# EAGLE board avoccado-nora2-test-jig-panel-100x100 (EAGLE 7.2.0), part 1 of 2
Avoccado-avr-yolandi Yolandi is the minified version of Avoccado-avr with less pins broken out and a footprint of less than one square inch for the PCB without peripherals.
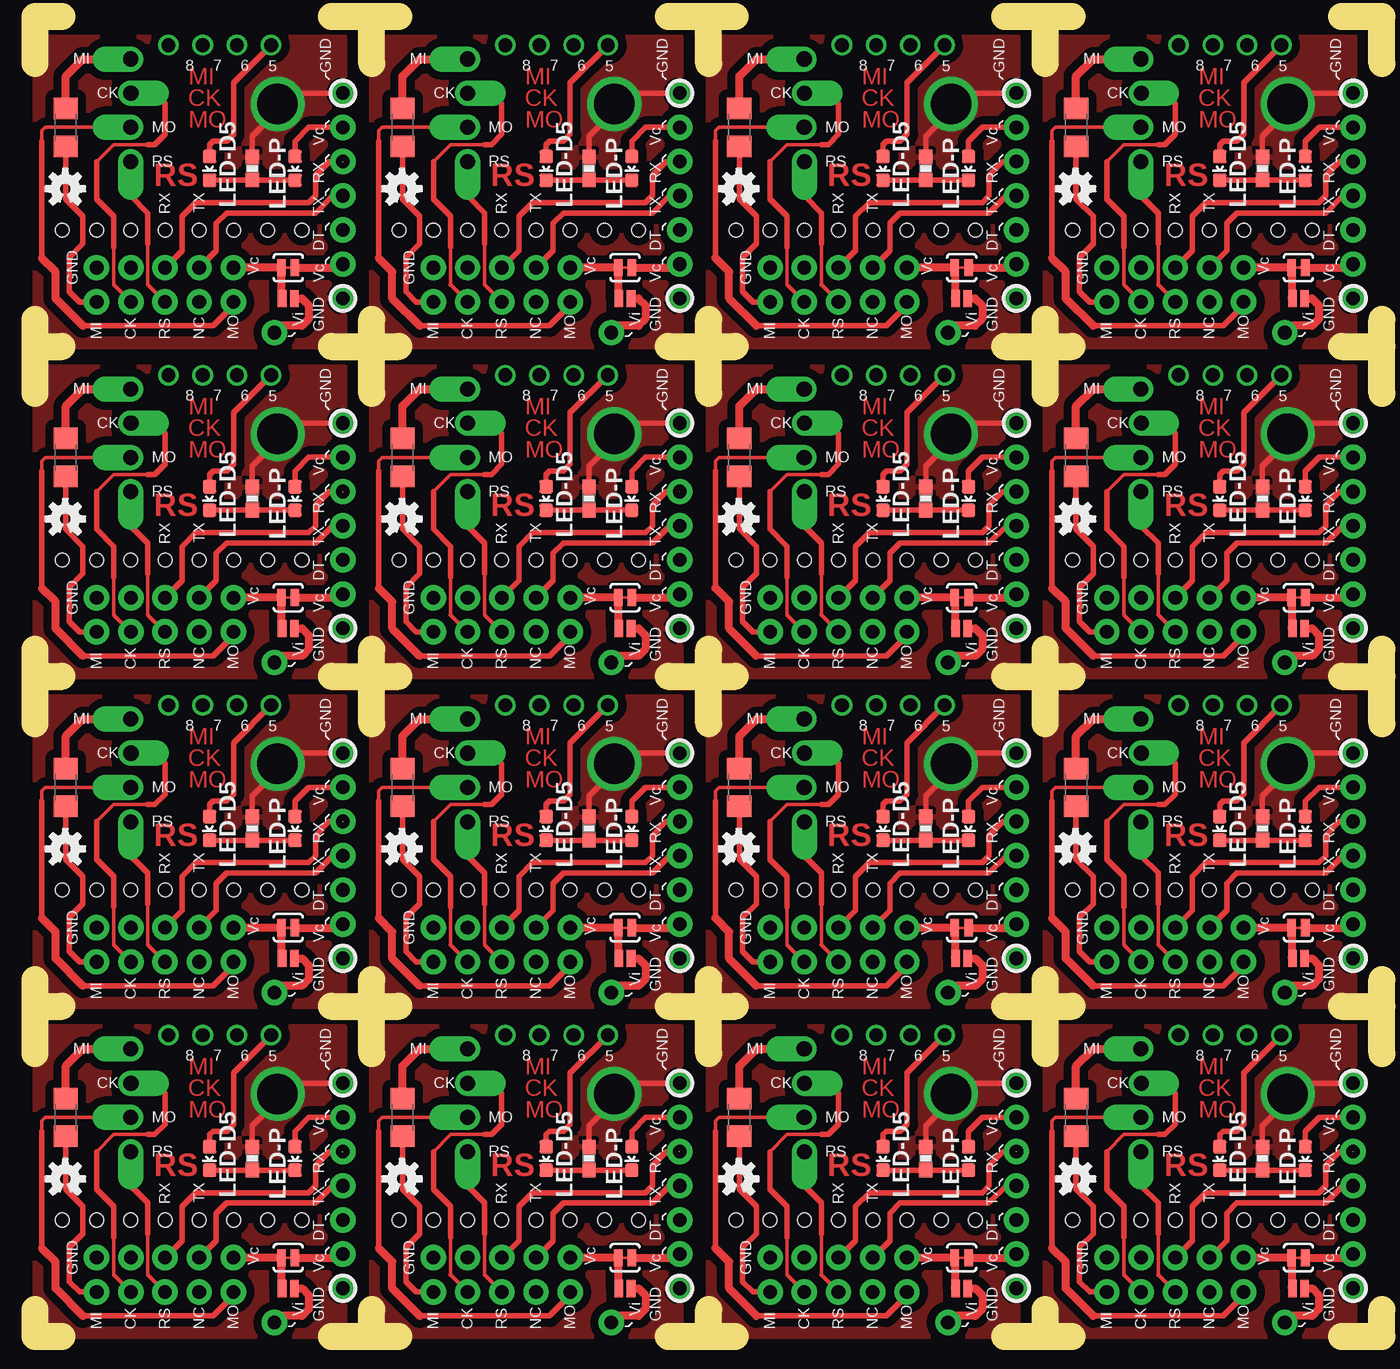
[diagram p0: board, top side]
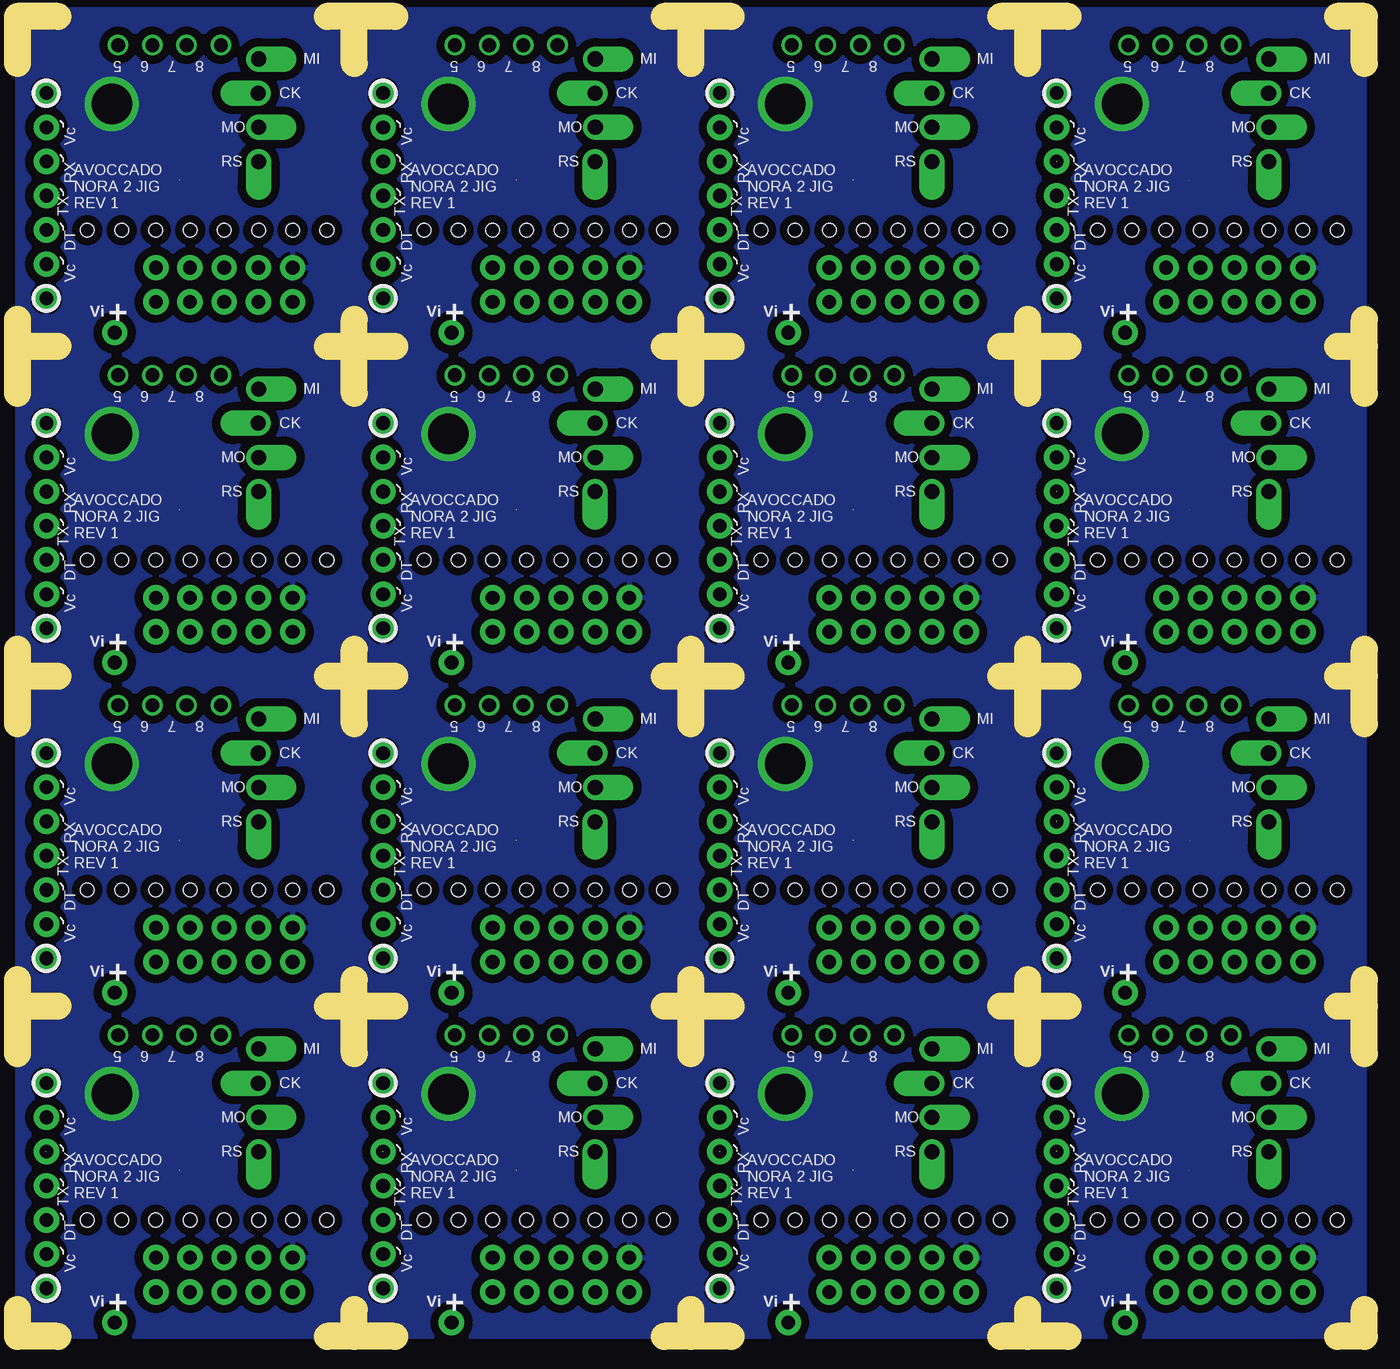
[diagram p1: board, bottom side, seen from below]

No outline drawn. Coordinates in mm, seen from the top.
Copper layers (1*16): Top 0.035mm / dielectric 1.5mm / Bottom 0.035mm
Design rules "dirt_cheap_dirty_boards.v1 *": minimum track width 5mil, minimum drill 12mil, track to track 5mil, track to pad 5mil, pad to pad 5mil, via to via 5mil, smd to smd 0mil, copper to edge 10mil, drill to drill 10mil, minimum pad ring 10mil, minimum via ring 6mil, stop-mask expansion 0mil, vias tented up to drill 25mil, thermal gap 10mil
Net classes: 1 vcc: width 0.254 mm; 3 usbvcc: width 0.203 mm, drill 0.61 mm, clearance 0.152 mm
Holes 1.02 mm at 4.57,8.64 7.11,8.64 9.65,8.64 12.19,8.64 14.73,8.64 17.27,8.64 19.81,8.64 2.03,8.64 4.57,33.14 7.11,33.14 9.65,33.14 12.19,33.14 14.73,33.14 17.27,33.14 19.81,33.14 2.03,33.14 29.57,8.64 32.11,8.64 34.65,8.64 37.19,8.64 39.73,8.64 42.27,8.64 44.81,8.64 27.03,8.64 29.57,33.14 32.11,33.14 34.65,33.14 37.19,33.14 39.73,33.14 42.27,33.14 44.81,33.14 27.03,33.14 54.57,8.64 57.11,8.64 59.65,8.64 62.19,8.64 64.73,8.64 67.27,8.64 69.81,8.64 52.03,8.64 54.57,33.14 57.11,33.14 59.65,33.14 62.19,33.14 64.73,33.14 67.27,33.14 69.81,33.14 52.03,33.14 79.57,8.64 82.11,8.64 84.65,8.64 87.19,8.64 89.73,8.64 92.27,8.64 94.81,8.64 77.03,8.64 79.57,33.14 82.11,33.14 84.65,33.14 87.19,33.14 89.73,33.14 92.27,33.14 94.81,33.14 77.03,33.14 4.57,57.64 7.11,57.64 9.65,57.64 12.19,57.64 14.73,57.64 17.27,57.64 19.81,57.64 2.03,57.64 4.57,82.14 7.11,82.14 9.65,82.14 12.19,82.14 14.73,82.14 17.27,82.14 19.81,82.14 2.03,82.14 29.57,57.64 32.11,57.64 34.65,57.64 37.19,57.64 39.73,57.64 42.27,57.64 44.81,57.64 27.03,57.64 29.57,82.14 32.11,82.14 34.65,82.14 37.19,82.14 39.73,82.14 42.27,82.14 44.81,82.14 27.03,82.14 54.57,57.64 57.11,57.64 59.65,57.64 62.19,57.64 64.73,57.64 67.27,57.64 69.81,57.64 52.03,57.64 54.57,82.14 57.11,82.14 59.65,82.14 62.19,82.14 64.73,82.14 67.27,82.14 69.81,82.14 52.03,82.14 79.57,57.64 82.11,57.64 84.65,57.64 87.19,57.64 89.73,57.64 92.27,57.64 94.81,57.64 77.03,57.64 79.57,82.14 82.11,82.14 84.65,82.14 87.19,82.14 89.73,82.14 92.27,82.14 94.81,82.14 77.03,82.14
tRestrict: area 3,3 to 14.7,7.1; area 7.1,9.1 to 12.7,21.3; area 12.7,19.8 to 14.7,21.3; area 1.5,3.6 to 5.1,15.7; area 3,27.5 to 14.7,31.6; area 7.1,33.6 to 12.7,45.8; area 12.7,44.3 to 14.7,45.8; area 1.5,28.1 to 5.1,40.2; area 28,3 to 39.7,7.1; area 32.1,9.1 to 37.7,21.3; area 37.7,19.8 to 39.7,21.3; area 26.5,3.6 to 30.1,15.7; 52 more areas
Milling: 128 lines

## Footprints (pad centres in the part's own frame; a part is rotated, then mirrored left to right if it is on the bottom)
LED-0603 = smd 1 x 1: A 0,-0.877; C 0,0.877
2X5_NOSILK = drill 1.016 pad 1.88: 1 -1.27,5.08; 2 1.27,5.08; 3 -1.27,2.54; 4 1.27,2.54; 5 -1.27,0; 6 1.27,0; 7 -1.27,-2.54; 8 1.27,-2.54; 9 -1.27,-5.08; 10 1.27,-5.08
1X01 = drill 1.016 pad 1.88: 1 0,0
1X01_OFFSET = drill 1.118 pad 1.88 offset: 1 0,0
1206 = smd 1.6 x 1.8: 1 -1.4,0; 2 1.4,0
0603-RES = smd 1.1 x 1: 1 -0.85,0; 2 0.85,0
PAD-JUMPER-2-NC_BY_TRACE_YES_SILK = smd 0.635 x 1.27: 1 -0.508,0; 2 0.508,0
PAD-JUMPER-2-NO_NO_SILK = smd 0.635 x 1.27: 1 -0.45,0; 2 0.45,0
1X01NS-KIT = drill 1.016 pad 1.524: 1 0,0

## Placement (x,y rotation side)
D5-LED  [LED-0603]  12.95,13.21 180 top
D5-LED1  [LED-0603]  12.95,37.71 180 top
D5-LED2  [LED-0603]  37.95,13.21 180 top
D5-LED3  [LED-0603]  37.95,37.71 180 top
D5-LED4  [LED-0603]  62.95,13.21 180 top
D5-LED5  [LED-0603]  62.95,37.71 180 top
D5-LED6  [LED-0603]  87.95,13.21 180 top
D5-LED7  [LED-0603]  87.95,37.71 180 top
D5-LED8  [LED-0603]  12.95,62.21 180 top
D5-LED9  [LED-0603]  12.95,86.71 180 top
D5-LED10  [LED-0603]  37.95,62.21 180 top
D5-LED11  [LED-0603]  37.95,86.71 180 top
D5-LED12  [LED-0603]  62.95,62.21 180 top
D5-LED13  [LED-0603]  62.95,86.71 180 top
D5-LED14  [LED-0603]  87.95,62.21 180 top
D5-LED15  [LED-0603]  87.95,86.71 180 top
ICSP  M05X2NO_SILK  [2X5_NOSILK]  9.65,4.57 90 bottom
ICSP1  M05X2NO_SILK  [2X5_NOSILK]  9.65,29.07 90 bottom
ICSP2  M05X2NO_SILK  [2X5_NOSILK]  34.65,4.57 90 bottom
ICSP3  M05X2NO_SILK  [2X5_NOSILK]  34.65,29.07 90 bottom
ICSP4  M05X2NO_SILK  [2X5_NOSILK]  59.65,4.57 90 bottom
ICSP5  M05X2NO_SILK  [2X5_NOSILK]  59.65,29.07 90 bottom
ICSP6  M05X2NO_SILK  [2X5_NOSILK]  84.65,4.57 90 bottom
ICSP7  M05X2NO_SILK  [2X5_NOSILK]  84.65,29.07 90 bottom
ICSP8  M05X2NO_SILK  [2X5_NOSILK]  9.65,53.57 90 bottom
ICSP9  M05X2NO_SILK  [2X5_NOSILK]  9.65,78.07 90 bottom
ICSP10  M05X2NO_SILK  [2X5_NOSILK]  34.65,53.57 90 bottom
ICSP11  M05X2NO_SILK  [2X5_NOSILK]  34.65,78.07 90 bottom
ICSP12  M05X2NO_SILK  [2X5_NOSILK]  59.65,53.57 90 bottom
ICSP13  M05X2NO_SILK  [2X5_NOSILK]  59.65,78.07 90 bottom
ICSP14  M05X2NO_SILK  [2X5_NOSILK]  84.65,53.57 90 bottom
ICSP15  M05X2NO_SILK  [2X5_NOSILK]  84.65,78.07 90 bottom
JP1  M01PTH  [1X01]  22.86,28.06 0 top
JP2  M01PTH  [1X01]  22.86,38.22 0 top
JP3  M01PTH  [1X01]  22.86,18.8 0 top
JP4  M01PTH  [1X01]  22.86,35.68 0 top
JP5  M01PTH  [1X01]  22.86,33.14 0 top
JP6  M01PTH  [1X01]  22.86,3.56 0 top
JP7  M01PTH  [1X01]  22.86,40.76 0 top
JP8  M01PTH  [1X01]  22.86,13.72 0 top
JP9  M01PTH  [1X01]  22.86,11.18 0 top
JP10  M01PTH  [1X01]  22.86,8.64 0 top
JP11  M01PTH  [1X01]  22.86,16.26 0 top
JP12  M01OFFSET  [1X01_OFFSET]  7.1,21.34 90 top
JP13  M01OFFSET  [1X01_OFFSET]  7.12,18.8 270 top
JP14  M01OFFSET  [1X01_OFFSET]  7.1,16.26 90 top
JP15  M01OFFSET  [1X01_OFFSET]  7.11,13.71 180 top
JP16  M01OFFSET  [1X01_OFFSET]  7.1,45.84 90 top
JP17  M01PTH  [1X01]  17.78,1.02 0 top
JP18  M01PTH  [1X01]  22.86,6.1 0 top
JP19  M01OFFSET  [1X01_OFFSET]  7.12,43.3 270 top
JP20  M01OFFSET  [1X01_OFFSET]  7.1,40.76 90 top
JP21  M01OFFSET  [1X01_OFFSET]  7.11,38.21 180 top
JP22  M01PTH  [1X01]  22.86,43.3 0 top
JP23  M01PTH  [1X01]  17.78,25.52 0 top
JP24  M01PTH  [1X01]  22.86,30.6 0 top
JP25  M01PTH  [1X01]  47.86,3.56 0 top
JP26  M01PTH  [1X01]  47.86,13.72 0 top
JP27  M01PTH  [1X01]  47.86,11.18 0 top
JP28  M01PTH  [1X01]  47.86,8.64 0 top
JP29  M01PTH  [1X01]  47.86,16.26 0 top
JP30  M01OFFSET  [1X01_OFFSET]  32.1,21.34 90 top
JP31  M01OFFSET  [1X01_OFFSET]  32.12,18.8 270 top
JP32  M01OFFSET  [1X01_OFFSET]  32.1,16.26 90 top
JP33  M01OFFSET  [1X01_OFFSET]  32.11,13.71 180 top
JP34  M01PTH  [1X01]  47.86,18.8 0 top
JP35  M01PTH  [1X01]  42.78,1.02 0 top
JP36  M01PTH  [1X01]  47.86,6.1 0 top
JP37  M01PTH  [1X01]  47.86,28.06 0 top
JP38  M01PTH  [1X01]  47.86,38.22 0 top
JP39  M01PTH  [1X01]  47.86,35.68 0 top
JP40  M01PTH  [1X01]  47.86,33.14 0 top
JP41  M01PTH  [1X01]  47.86,40.76 0 top
JP42  M01OFFSET  [1X01_OFFSET]  32.1,45.84 90 top
JP43  M01OFFSET  [1X01_OFFSET]  32.12,43.3 270 top
JP44  M01OFFSET  [1X01_OFFSET]  32.1,40.76 90 top
JP45  M01OFFSET  [1X01_OFFSET]  32.11,38.21 180 top
JP46  M01PTH  [1X01]  47.86,43.3 0 top
JP47  M01PTH  [1X01]  42.78,25.52 0 top
JP48  M01PTH  [1X01]  47.86,30.6 0 top
JP49  M01PTH  [1X01]  72.86,3.56 0 top
JP50  M01PTH  [1X01]  72.86,13.72 0 top
JP51  M01PTH  [1X01]  72.86,11.18 0 top
JP52  M01PTH  [1X01]  72.86,8.64 0 top
JP53  M01PTH  [1X01]  72.86,16.26 0 top
JP54  M01OFFSET  [1X01_OFFSET]  57.1,21.34 90 top
JP55  M01OFFSET  [1X01_OFFSET]  57.12,18.8 270 top
JP56  M01OFFSET  [1X01_OFFSET]  57.1,16.26 90 top
JP57  M01OFFSET  [1X01_OFFSET]  57.11,13.71 180 top
JP58  M01PTH  [1X01]  72.86,18.8 0 top
JP59  M01PTH  [1X01]  67.78,1.02 0 top
JP60  M01PTH  [1X01]  72.86,6.1 0 top
JP61  M01PTH  [1X01]  72.86,28.06 0 top
JP62  M01PTH  [1X01]  72.86,38.22 0 top
JP63  M01PTH  [1X01]  72.86,35.68 0 top
JP64  M01PTH  [1X01]  72.86,33.14 0 top
JP65  M01PTH  [1X01]  72.86,40.76 0 top
JP66  M01OFFSET  [1X01_OFFSET]  57.1,45.84 90 top
JP67  M01OFFSET  [1X01_OFFSET]  57.12,43.3 270 top
JP68  M01OFFSET  [1X01_OFFSET]  57.1,40.76 90 top
JP69  M01OFFSET  [1X01_OFFSET]  57.11,38.21 180 top
JP70  M01PTH  [1X01]  72.86,43.3 0 top
JP71  M01PTH  [1X01]  67.78,25.52 0 top
JP72  M01PTH  [1X01]  72.86,30.6 0 top
JP73  M01PTH  [1X01]  97.86,3.56 0 top
JP74  M01PTH  [1X01]  97.86,13.72 0 top
JP75  M01PTH  [1X01]  97.86,11.18 0 top
JP76  M01PTH  [1X01]  97.86,8.64 0 top
JP77  M01PTH  [1X01]  97.86,16.26 0 top
JP78  M01OFFSET  [1X01_OFFSET]  82.1,21.34 90 top
JP79  M01OFFSET  [1X01_OFFSET]  82.12,18.8 270 top
JP80  M01OFFSET  [1X01_OFFSET]  82.1,16.26 90 top
JP81  M01OFFSET  [1X01_OFFSET]  82.11,13.71 180 top
JP82  M01PTH  [1X01]  97.86,18.8 0 top
JP83  M01PTH  [1X01]  92.78,1.02 0 top
JP84  M01PTH  [1X01]  97.86,6.1 0 top
JP85  M01PTH  [1X01]  97.86,28.06 0 top
JP86  M01PTH  [1X01]  97.86,38.22 0 top
JP87  M01PTH  [1X01]  97.86,35.68 0 top
JP88  M01PTH  [1X01]  97.86,33.14 0 top
JP89  M01PTH  [1X01]  97.86,40.76 0 top
JP90  M01OFFSET  [1X01_OFFSET]  82.1,45.84 90 top
JP91  M01OFFSET  [1X01_OFFSET]  82.12,43.3 270 top
JP92  M01OFFSET  [1X01_OFFSET]  82.1,40.76 90 top
JP93  M01OFFSET  [1X01_OFFSET]  82.11,38.21 180 top
JP94  M01PTH  [1X01]  97.86,43.3 0 top
JP95  M01PTH  [1X01]  92.78,25.52 0 top
JP96  M01PTH  [1X01]  97.86,30.6 0 top
JP97  M01PTH  [1X01]  22.86,52.56 0 top
JP98  M01PTH  [1X01]  22.86,62.72 0 top
JP99  M01PTH  [1X01]  22.86,60.18 0 top
JP100  M01PTH  [1X01]  22.86,57.64 0 top
JP101  M01PTH  [1X01]  22.86,65.26 0 top
JP102  M01OFFSET  [1X01_OFFSET]  7.1,70.34 90 top
JP103  M01OFFSET  [1X01_OFFSET]  7.12,67.8 270 top
JP104  M01OFFSET  [1X01_OFFSET]  7.1,65.26 90 top
JP105  M01OFFSET  [1X01_OFFSET]  7.11,62.71 180 top
JP106  M01PTH  [1X01]  22.86,67.8 0 top
JP107  M01PTH  [1X01]  17.78,50.02 0 top
JP108  M01PTH  [1X01]  22.86,55.1 0 top
JP109  M01PTH  [1X01]  22.86,77.06 0 top
JP110  M01PTH  [1X01]  22.86,87.22 0 top
JP111  M01PTH  [1X01]  22.86,84.68 0 top
JP112  M01PTH  [1X01]  22.86,82.14 0 top
JP113  M01PTH  [1X01]  22.86,89.76 0 top
JP114  M01OFFSET  [1X01_OFFSET]  7.1,94.84 90 top
JP115  M01OFFSET  [1X01_OFFSET]  7.12,92.3 270 top
JP116  M01OFFSET  [1X01_OFFSET]  7.1,89.76 90 top
JP117  M01OFFSET  [1X01_OFFSET]  7.11,87.21 180 top
JP118  M01PTH  [1X01]  22.86,92.3 0 top
JP119  M01PTH  [1X01]  17.78,74.52 0 top
JP120  M01PTH  [1X01]  22.86,79.6 0 top
JP121  M01PTH  [1X01]  47.86,52.56 0 top
JP122  M01PTH  [1X01]  47.86,62.72 0 top
JP123  M01PTH  [1X01]  47.86,60.18 0 top
JP124  M01PTH  [1X01]  47.86,57.64 0 top
JP125  M01PTH  [1X01]  47.86,65.26 0 top
JP126  M01OFFSET  [1X01_OFFSET]  32.1,70.34 90 top
JP127  M01OFFSET  [1X01_OFFSET]  32.12,67.8 270 top
JP128  M01OFFSET  [1X01_OFFSET]  32.1,65.26 90 top
JP129  M01OFFSET  [1X01_OFFSET]  32.11,62.71 180 top
JP130  M01PTH  [1X01]  47.86,67.8 0 top
JP131  M01PTH  [1X01]  42.78,50.02 0 top
JP132  M01PTH  [1X01]  47.86,55.1 0 top
JP133  M01PTH  [1X01]  47.86,77.06 0 top
JP134  M01PTH  [1X01]  47.86,87.22 0 top
JP135  M01PTH  [1X01]  47.86,84.68 0 top
JP136  M01PTH  [1X01]  47.86,82.14 0 top
JP137  M01PTH  [1X01]  47.86,89.76 0 top
JP138  M01OFFSET  [1X01_OFFSET]  32.1,94.84 90 top
JP139  M01OFFSET  [1X01_OFFSET]  32.12,92.3 270 top
JP140  M01OFFSET  [1X01_OFFSET]  32.1,89.76 90 top
JP141  M01OFFSET  [1X01_OFFSET]  32.11,87.21 180 top
JP142  M01PTH  [1X01]  47.86,92.3 0 top
JP143  M01PTH  [1X01]  42.78,74.52 0 top
JP144  M01PTH  [1X01]  47.86,79.6 0 top
JP145  M01PTH  [1X01]  72.86,52.56 0 top
JP146  M01PTH  [1X01]  72.86,62.72 0 top
JP147  M01PTH  [1X01]  72.86,60.18 0 top
JP148  M01PTH  [1X01]  72.86,57.64 0 top
JP149  M01PTH  [1X01]  72.86,65.26 0 top
JP150  M01OFFSET  [1X01_OFFSET]  57.1,70.34 90 top
JP151  M01OFFSET  [1X01_OFFSET]  57.12,67.8 270 top
JP152  M01OFFSET  [1X01_OFFSET]  57.1,65.26 90 top
JP153  M01OFFSET  [1X01_OFFSET]  57.11,62.71 180 top
JP154  M01PTH  [1X01]  72.86,67.8 0 top
JP155  M01PTH  [1X01]  67.78,50.02 0 top
JP156  M01PTH  [1X01]  72.86,55.1 0 top
JP157  M01PTH  [1X01]  72.86,77.06 0 top
JP158  M01PTH  [1X01]  72.86,87.22 0 top
JP159  M01PTH  [1X01]  72.86,84.68 0 top
JP160  M01PTH  [1X01]  72.86,82.14 0 top
JP161  M01PTH  [1X01]  72.86,89.76 0 top
JP162  M01OFFSET  [1X01_OFFSET]  57.1,94.84 90 top
JP163  M01OFFSET  [1X01_OFFSET]  57.12,92.3 270 top
JP164  M01OFFSET  [1X01_OFFSET]  57.1,89.76 90 top
JP165  M01OFFSET  [1X01_OFFSET]  57.11,87.21 180 top
JP166  M01PTH  [1X01]  72.86,92.3 0 top
JP167  M01PTH  [1X01]  67.78,74.52 0 top
JP168  M01PTH  [1X01]  72.86,79.6 0 top
JP169  M01PTH  [1X01]  97.86,52.56 0 top
JP170  M01PTH  [1X01]  97.86,62.72 0 top
JP171  M01PTH  [1X01]  97.86,60.18 0 top
JP172  M01PTH  [1X01]  97.86,57.64 0 top
JP173  M01PTH  [1X01]  97.86,65.26 0 top
JP174  M01OFFSET  [1X01_OFFSET]  82.1,70.34 90 top
JP175  M01OFFSET  [1X01_OFFSET]  82.12,67.8 270 top
JP176  M01OFFSET  [1X01_OFFSET]  82.1,65.26 90 top
JP177  M01OFFSET  [1X01_OFFSET]  82.11,62.71 180 top
JP178  M01PTH  [1X01]  97.86,67.8 0 top
JP179  M01PTH  [1X01]  92.78,50.02 0 top
JP180  M01PTH  [1X01]  97.86,55.1 0 top
JP181  M01PTH  [1X01]  97.86,77.06 0 top
JP182  M01PTH  [1X01]  97.86,87.22 0 top
JP183  M01PTH  [1X01]  97.86,84.68 0 top
JP184  M01PTH  [1X01]  97.86,82.14 0 top
JP185  M01PTH  [1X01]  97.86,89.76 0 top
JP186  M01OFFSET  [1X01_OFFSET]  82.1,94.84 90 top
JP187  M01OFFSET  [1X01_OFFSET]  82.12,92.3 270 top
JP188  M01OFFSET  [1X01_OFFSET]  82.1,89.76 90 top
JP189  M01OFFSET  [1X01_OFFSET]  82.11,87.21 180 top
JP190  M01PTH  [1X01]  97.86,92.3 0 top
JP191  M01PTH  [1X01]  92.78,74.52 0 top
JP192  M01PTH  [1X01]  97.86,79.6 0 top
LOGO1  OSHW-LOGOS  [OSHW-LOGO-S]  2.25,36.19 0 top
LOGO2  OSHW-LOGOS  [OSHW-LOGO-S]  2.25,11.69 0 top
LOGO3  OSHW-LOGOS  [OSHW-LOGO-S]  27.25,11.69 0 top
LOGO4  OSHW-LOGOS  [OSHW-LOGO-S]  27.25,36.19 0 top
LOGO5  OSHW-LOGOS  [OSHW-LOGO-S]  52.25,11.69 0 top
LOGO6  OSHW-LOGOS  [OSHW-LOGO-S]  52.25,36.19 0 top
LOGO7  OSHW-LOGOS  [OSHW-LOGO-S]  77.25,11.69 0 top
LOGO8  OSHW-LOGOS  [OSHW-LOGO-S]  77.25,36.19 0 top
LOGO9  OSHW-LOGOS  [OSHW-LOGO-S]  2.25,60.69 0 top
LOGO10  OSHW-LOGOS  [OSHW-LOGO-S]  2.25,85.19 0 top
LOGO11  OSHW-LOGOS  [OSHW-LOGO-S]  27.25,60.69 0 top
LOGO12  OSHW-LOGOS  [OSHW-LOGO-S]  27.25,85.19 0 top
LOGO13  OSHW-LOGOS  [OSHW-LOGO-S]  52.25,60.69 0 top
LOGO14  OSHW-LOGOS  [OSHW-LOGO-S]  52.25,85.19 0 top
LOGO15  OSHW-LOGOS  [OSHW-LOGO-S]  77.25,60.69 0 top
LOGO16  OSHW-LOGOS  [OSHW-LOGO-S]  77.25,85.19 0 top
PWR-LED  [LED-0603]  19.3,13.21 180 top
PWR-LED1  [LED-0603]  19.3,37.71 180 top
PWR-LED2  [LED-0603]  44.3,13.21 180 top
PWR-LED3  [LED-0603]  44.3,37.71 180 top
PWR-LED4  [LED-0603]  69.3,13.21 180 top
PWR-LED5  [LED-0603]  69.3,37.71 180 top
PWR-LED6  [LED-0603]  94.3,13.21 180 top
PWR-LED7  [LED-0603]  94.3,37.71 180 top
PWR-LED8  [LED-0603]  19.3,62.21 180 top
PWR-LED9  [LED-0603]  19.3,86.71 180 top
PWR-LED10  [LED-0603]  44.3,62.21 180 top
PWR-LED11  [LED-0603]  44.3,86.71 180 top
PWR-LED12  [LED-0603]  69.3,62.21 180 top
PWR-LED13  [LED-0603]  69.3,86.71 180 top
PWR-LED14  [LED-0603]  94.3,62.21 180 top
PWR-LED15  [LED-0603]  94.3,86.71 180 top
R1  0  [1206]  2.29,16.26 270 top
R2  1K  [0603-RES]  16.13,13.21 90 top
R3  0  [1206]  2.29,40.76 270 top
R4  1K  [0603-RES]  16.13,37.71 90 top
R5  0  [1206]  27.29,16.26 270 top
R6  1K  [0603-RES]  41.13,13.21 90 top
R7  0  [1206]  27.29,40.76 270 top
R8  1K  [0603-RES]  41.13,37.71 90 top
R9  0  [1206]  52.29,16.26 270 top
R10  1K  [0603-RES]  66.13,13.21 90 top
R11  0  [1206]  52.29,40.76 270 top
R12  1K  [0603-RES]  66.13,37.71 90 top
R13  0  [1206]  77.29,16.26 270 top
R14  1K  [0603-RES]  91.13,13.21 90 top
R15  0  [1206]  77.29,40.76 270 top
R16  1K  [0603-RES]  91.13,37.71 90 top
R17  0  [1206]  2.29,65.26 270 top
R18  1K  [0603-RES]  16.13,62.21 90 top
R19  0  [1206]  2.29,89.76 270 top
R20  1K  [0603-RES]  16.13,86.71 90 top
R21  0  [1206]  27.29,65.26 270 top
R22  1K  [0603-RES]  41.13,62.21 90 top
R23  0  [1206]  27.29,89.76 270 top
R24  1K  [0603-RES]  41.13,86.71 90 top
R25  0  [1206]  52.29,65.26 270 top
R26  1K  [0603-RES]  66.13,62.21 90 top
R27  0  [1206]  52.29,89.76 270 top
R28  1K  [0603-RES]  66.13,86.71 90 top
R29  0  [1206]  77.29,65.26 270 top
R30  1K  [0603-RES]  91.13,62.21 90 top
R31  0  [1206]  77.29,89.76 270 top
R32  1K  [0603-RES]  91.13,86.71 90 top
SJ1  JUMPER-PAD-2-NC_BY_TRACE  [PAD-JUMPER-2-NC_BY_TRACE_YES_SILK]  18.8,5.84 180 top
SJ2  JUMPER-PAD-2-NO  [PAD-JUMPER-2-NO_NO_SILK]  18.8,3.56 180 top
SJ3  JUMPER-PAD-2-NC_BY_TRACE  [PAD-JUMPER-2-NC_BY_TRACE_YES_SILK]  18.8,30.34 180 top
SJ4  JUMPER-PAD-2-NO  [PAD-JUMPER-2-NO_NO_SILK]  18.8,28.06 180 top
SJ5  JUMPER-PAD-2-NC_BY_TRACE  [PAD-JUMPER-2-NC_BY_TRACE_YES_SILK]  43.8,5.84 180 top
SJ6  JUMPER-PAD-2-NO  [PAD-JUMPER-2-NO_NO_SILK]  43.8,3.56 180 top
SJ7  JUMPER-PAD-2-NC_BY_TRACE  [PAD-JUMPER-2-NC_BY_TRACE_YES_SILK]  43.8,30.34 180 top
SJ8  JUMPER-PAD-2-NO  [PAD-JUMPER-2-NO_NO_SILK]  43.8,28.06 180 top
SJ9  JUMPER-PAD-2-NC_BY_TRACE  [PAD-JUMPER-2-NC_BY_TRACE_YES_SILK]  68.8,5.84 180 top
SJ10  JUMPER-PAD-2-NO  [PAD-JUMPER-2-NO_NO_SILK]  68.8,3.56 180 top
SJ11  JUMPER-PAD-2-NC_BY_TRACE  [PAD-JUMPER-2-NC_BY_TRACE_YES_SILK]  68.8,30.34 180 top
SJ12  JUMPER-PAD-2-NO  [PAD-JUMPER-2-NO_NO_SILK]  68.8,28.06 180 top
SJ13  JUMPER-PAD-2-NC_BY_TRACE  [PAD-JUMPER-2-NC_BY_TRACE_YES_SILK]  93.8,5.84 180 top
SJ14  JUMPER-PAD-2-NO  [PAD-JUMPER-2-NO_NO_SILK]  93.8,3.56 180 top
SJ15  JUMPER-PAD-2-NC_BY_TRACE  [PAD-JUMPER-2-NC_BY_TRACE_YES_SILK]  93.8,30.34 180 top
SJ16  JUMPER-PAD-2-NO  [PAD-JUMPER-2-NO_NO_SILK]  93.8,28.06 180 top
SJ17  JUMPER-PAD-2-NC_BY_TRACE  [PAD-JUMPER-2-NC_BY_TRACE_YES_SILK]  18.8,54.84 180 top
SJ18  JUMPER-PAD-2-NO  [PAD-JUMPER-2-NO_NO_SILK]  18.8,52.56 180 top
SJ19  JUMPER-PAD-2-NC_BY_TRACE  [PAD-JUMPER-2-NC_BY_TRACE_YES_SILK]  18.8,79.34 180 top
SJ20  JUMPER-PAD-2-NO  [PAD-JUMPER-2-NO_NO_SILK]  18.8,77.06 180 top
SJ21  JUMPER-PAD-2-NC_BY_TRACE  [PAD-JUMPER-2-NC_BY_TRACE_YES_SILK]  43.8,54.84 180 top
SJ22  JUMPER-PAD-2-NO  [PAD-JUMPER-2-NO_NO_SILK]  43.8,52.56 180 top
SJ23  JUMPER-PAD-2-NC_BY_TRACE  [PAD-JUMPER-2-NC_BY_TRACE_YES_SILK]  43.8,79.34 180 top
SJ24  JUMPER-PAD-2-NO  [PAD-JUMPER-2-NO_NO_SILK]  43.8,77.06 180 top
SJ25  JUMPER-PAD-2-NC_BY_TRACE  [PAD-JUMPER-2-NC_BY_TRACE_YES_SILK]  68.8,54.84 180 top
SJ26  JUMPER-PAD-2-NO  [PAD-JUMPER-2-NO_NO_SILK]  68.8,52.56 180 top
SJ27  JUMPER-PAD-2-NC_BY_TRACE  [PAD-JUMPER-2-NC_BY_TRACE_YES_SILK]  68.8,79.34 180 top
SJ28  JUMPER-PAD-2-NO  [PAD-JUMPER-2-NO_NO_SILK]  68.8,77.06 180 top
SJ29  JUMPER-PAD-2-NC_BY_TRACE  [PAD-JUMPER-2-NC_BY_TRACE_YES_SILK]  93.8,54.84 180 top
SJ30  JUMPER-PAD-2-NO  [PAD-JUMPER-2-NO_NO_SILK]  93.8,52.56 180 top
SJ31  JUMPER-PAD-2-NC_BY_TRACE  [PAD-JUMPER-2-NC_BY_TRACE_YES_SILK]  93.8,79.34 180 top
SJ32  JUMPER-PAD-2-NO  [PAD-JUMPER-2-NO_NO_SILK]  93.8,77.06 180 top
TP1  M01NOSILK-KIT  [1X01NS-KIT]  17.53,22.36 270 top
TP2  M01NOSILK-KIT  [1X01NS-KIT]  17.53,46.86 270 top
TP3  M01NOSILK-KIT  [1X01NS-KIT]  14.99,46.86 270 top
TP4  M01NOSILK-KIT  [1X01NS-KIT]  12.45,46.86 270 top
TP5  M01NOSILK-KIT  [1X01NS-KIT]  9.91,46.86 270 top
TP6  M01NOSILK-KIT  [1X01NS-KIT]  14.99,22.36 270 top
TP7  M01NOSILK-KIT  [1X01NS-KIT]  12.45,22.36 270 top
TP8  M01NOSILK-KIT  [1X01NS-KIT]  9.91,22.36 270 top
TP9  M01NOSILK-KIT  [1X01NS-KIT]  42.53,22.36 270 top
TP10  M01NOSILK-KIT  [1X01NS-KIT]  39.99,22.36 270 top
TP11  M01NOSILK-KIT  [1X01NS-KIT]  37.45,22.36 270 top
TP12  M01NOSILK-KIT  [1X01NS-KIT]  34.91,22.36 270 top
TP13  M01NOSILK-KIT  [1X01NS-KIT]  42.53,46.86 270 top
TP14  M01NOSILK-KIT  [1X01NS-KIT]  39.99,46.86 270 top
TP15  M01NOSILK-KIT  [1X01NS-KIT]  37.45,46.86 270 top
TP16  M01NOSILK-KIT  [1X01NS-KIT]  34.91,46.86 270 top
TP17  M01NOSILK-KIT  [1X01NS-KIT]  67.53,22.36 270 top
TP18  M01NOSILK-KIT  [1X01NS-KIT]  64.99,22.36 270 top
TP19  M01NOSILK-KIT  [1X01NS-KIT]  62.45,22.36 270 top
TP20  M01NOSILK-KIT  [1X01NS-KIT]  59.91,22.36 270 top
TP21  M01NOSILK-KIT  [1X01NS-KIT]  67.53,46.86 270 top
TP22  M01NOSILK-KIT  [1X01NS-KIT]  64.99,46.86 270 top
TP23  M01NOSILK-KIT  [1X01NS-KIT]  62.45,46.86 270 top
TP24  M01NOSILK-KIT  [1X01NS-KIT]  59.91,46.86 270 top
TP25  M01NOSILK-KIT  [1X01NS-KIT]  92.53,22.36 270 top
TP26  M01NOSILK-KIT  [1X01NS-KIT]  89.99,22.36 270 top
TP27  M01NOSILK-KIT  [1X01NS-KIT]  87.45,22.36 270 top
TP28  M01NOSILK-KIT  [1X01NS-KIT]  84.91,22.36 270 top
TP29  M01NOSILK-KIT  [1X01NS-KIT]  92.53,46.86 270 top
TP30  M01NOSILK-KIT  [1X01NS-KIT]  89.99,46.86 270 top
TP31  M01NOSILK-KIT  [1X01NS-KIT]  87.45,46.86 270 top
TP32  M01NOSILK-KIT  [1X01NS-KIT]  84.91,46.86 270 top
TP33  M01NOSILK-KIT  [1X01NS-KIT]  17.53,71.36 270 top
TP34  M01NOSILK-KIT  [1X01NS-KIT]  14.99,71.36 270 top
TP35  M01NOSILK-KIT  [1X01NS-KIT]  12.45,71.36 270 top
TP36  M01NOSILK-KIT  [1X01NS-KIT]  9.91,71.36 270 top
TP37  M01NOSILK-KIT  [1X01NS-KIT]  17.53,95.86 270 top
TP38  M01NOSILK-KIT  [1X01NS-KIT]  14.99,95.86 270 top
TP39  M01NOSILK-KIT  [1X01NS-KIT]  12.45,95.86 270 top
TP40  M01NOSILK-KIT  [1X01NS-KIT]  9.91,95.86 270 top
TP41  M01NOSILK-KIT  [1X01NS-KIT]  42.53,71.36 270 top
TP42  M01NOSILK-KIT  [1X01NS-KIT]  39.99,71.36 270 top
TP43  M01NOSILK-KIT  [1X01NS-KIT]  37.45,71.36 270 top
TP44  M01NOSILK-KIT  [1X01NS-KIT]  34.91,71.36 270 top
TP45  M01NOSILK-KIT  [1X01NS-KIT]  42.53,95.86 270 top
TP46  M01NOSILK-KIT  [1X01NS-KIT]  39.99,95.86 270 top
TP47  M01NOSILK-KIT  [1X01NS-KIT]  37.45,95.86 270 top
TP48  M01NOSILK-KIT  [1X01NS-KIT]  34.91,95.86 270 top
TP49  M01NOSILK-KIT  [1X01NS-KIT]  67.53,71.36 270 top
TP50  M01NOSILK-KIT  [1X01NS-KIT]  64.99,71.36 270 top
TP51  M01NOSILK-KIT  [1X01NS-KIT]  62.45,71.36 270 top
TP52  M01NOSILK-KIT  [1X01NS-KIT]  59.91,71.36 270 top
TP53  M01NOSILK-KIT  [1X01NS-KIT]  67.53,95.86 270 top
TP54  M01NOSILK-KIT  [1X01NS-KIT]  64.99,95.86 270 top
TP55  M01NOSILK-KIT  [1X01NS-KIT]  62.45,95.86 270 top
TP56  M01NOSILK-KIT  [1X01NS-KIT]  59.91,95.86 270 top
TP57  M01NOSILK-KIT  [1X01NS-KIT]  92.53,71.36 270 top
TP58  M01NOSILK-KIT  [1X01NS-KIT]  89.99,71.36 270 top
TP59  M01NOSILK-KIT  [1X01NS-KIT]  87.45,71.36 270 top
TP60  M01NOSILK-KIT  [1X01NS-KIT]  84.91,71.36 270 top
TP61  M01NOSILK-KIT  [1X01NS-KIT]  92.53,95.86 270 top
TP62  M01NOSILK-KIT  [1X01NS-KIT]  89.99,95.86 270 top
TP63  M01NOSILK-KIT  [1X01NS-KIT]  87.45,95.86 270 top
TP64  M01NOSILK-KIT  [1X01NS-KIT]  84.91,95.86 270 top

## Library data of the parts
D5-LED D5-LED1-D5-LED15 PWR-LED PWR-LED1-PWR-LED15 = SparkFun-LED
ICSP ICSP1-ICSP15 JP1-JP192 TP1-TP64 = SparkFun-Connectors
LOGO1-LOGO16 = SparkFun-Aesthetics
R1 R3 R5 R7 R9 R11 R13 R15 R17 R19 R21 R23 R25 R27 R29 R31 SJ1-SJ32 = SparkFun-Passives
R2 R4 R6 R8 R10 R12 R14 R16 R18 R20 R22 R24 R26 R28 R30 R32 = SparkFun-Resistors

## Nets
3.3V: JP18.1 SJ1.1
3.3V1: JP24.1 SJ3.1
3.3V2: JP36.1 SJ5.1
3.3V3: JP48.1 SJ7.1
3.3V4: JP60.1 SJ9.1
3.3V5: JP72.1 SJ11.1
3.3V6: JP84.1 SJ13.1
3.3V7: JP96.1 SJ15.1
3.3V8: JP108.1 SJ17.1
3.3V9: JP120.1 SJ19.1
3.3V10: JP132.1 SJ21.1
3.3V11: JP144.1 SJ23.1
3.3V12: JP156.1 SJ25.1
3.3V13: JP168.1 SJ27.1
3.3V14: JP180.1 SJ29.1
3.3V15: JP192.1 SJ31.1
5V: JP17.1 SJ2.1
5V1: JP23.1 SJ4.1
5V2: JP35.1 SJ6.1
5V3: JP47.1 SJ8.1
5V4: JP59.1 SJ10.1
5V5: JP71.1 SJ12.1
5V6: JP83.1 SJ14.1
5V7: JP95.1 SJ16.1
5V8: JP107.1 SJ18.1
5V9: JP119.1 SJ20.1
5V10: JP131.1 SJ22.1
5V11: JP143.1 SJ24.1
5V12: JP155.1 SJ26.1
5V13: JP167.1 SJ28.1
5V14: JP179.1 SJ30.1
5V15: JP191.1 SJ32.1
D1: TP5.1
D2: D5-LED1.A TP2.1
D3: TP3.1
D4: TP4.1
D5: D5-LED.A TP1.1
D6: TP6.1
D7: TP7.1
D8: TP8.1
D9: TP12.1
D10: D5-LED2.A TP9.1
D11: TP10.1
D12: TP11.1
D13: TP16.1
D14: D5-LED3.A TP13.1
D15: TP14.1
D16: TP15.1
D17: TP20.1
D18: D5-LED4.A TP17.1
D19: TP18.1
D20: TP19.1
D21: TP24.1
D22: D5-LED5.A TP21.1
D23: TP22.1
D24: TP23.1
D25: TP28.1
D26: D5-LED6.A TP25.1
D27: TP26.1
D28: TP27.1
D29: TP32.1
D30: D5-LED7.A TP29.1
D31: TP30.1
D32: TP31.1
D33: TP36.1
D34: D5-LED8.A TP33.1
D35: TP34.1
D36: TP35.1
D37: TP40.1
D38: D5-LED9.A TP37.1
D39: TP38.1
D40: TP39.1
D41: TP44.1
D42: D5-LED10.A TP41.1
D43: TP42.1
D44: TP43.1
D45: TP48.1
D46: D5-LED11.A TP45.1
D47: TP46.1
D48: TP47.1
D49: TP52.1
D50: D5-LED12.A TP49.1
D51: TP50.1
D52: TP51.1
D53: TP56.1
D54: D5-LED13.A TP53.1
D55: TP54.1
D56: TP55.1
D57: TP60.1
D58: D5-LED14.A TP57.1
D59: TP58.1
D60: TP59.1
D61: TP64.1
D62: D5-LED15.A TP61.1
D63: TP62.1
D64: TP63.1
DTR: JP10.1
DTR1: JP5.1
DTR2: JP28.1
DTR3: JP40.1
DTR4: JP52.1
DTR5: JP64.1
DTR6: JP76.1
DTR7: JP88.1
DTR8: JP100.1
DTR9: JP112.1
DTR10: JP124.1
DTR11: JP136.1
DTR12: JP148.1
DTR13: JP160.1
DTR14: JP172.1
DTR15: JP184.1
GND [vcc]: ICSP.10 JP3.1 JP6.1 R2.2
GND1 [vcc]: ICSP1.10 JP1.1 JP22.1 R4.2
GND2 [vcc]: ICSP2.10 JP25.1 JP34.1 R6.2
GND3 [vcc]: ICSP3.10 JP37.1 JP46.1 R8.2
GND4 [vcc]: ICSP4.10 JP49.1 JP58.1 R10.2
GND5 [vcc]: ICSP5.10 JP61.1 JP70.1 R12.2
GND6 [vcc]: ICSP6.10 JP73.1 JP82.1 R14.2
GND7 [vcc]: ICSP7.10 JP85.1 JP94.1 R16.2
GND8 [vcc]: ICSP8.10 JP97.1 JP106.1 R18.2
GND9 [vcc]: ICSP9.10 JP109.1 JP118.1 R20.2
GND10 [vcc]: ICSP10.10 JP121.1 JP130.1 R22.2
GND11 [vcc]: ICSP11.10 JP133.1 JP142.1 R24.2
GND12 [vcc]: ICSP12.10 JP145.1 JP154.1 R26.2
GND13 [vcc]: ICSP13.10 JP157.1 JP166.1 R28.2
GND14 [vcc]: ICSP14.10 JP169.1 JP178.1 R30.2
GND15 [vcc]: ICSP15.10 JP181.1 JP190.1 R32.2
MISO: JP12.1 R1.1
MISO1: ICSP.9 R1.2
MISO2: JP16.1 R3.1
MISO3: ICSP1.9 R3.2
MISO4: JP30.1 R5.1
MISO5: ICSP2.9 R5.2
MISO6: JP42.1 R7.1
MISO7: ICSP3.9 R7.2
MISO8: JP54.1 R9.1
MISO9: ICSP4.9 R9.2
MISO10: JP66.1 R11.1
MISO11: ICSP5.9 R11.2
MISO12: JP78.1 R13.1
MISO13: ICSP6.9 R13.2
MISO14: JP90.1 R15.1
MISO15: ICSP7.9 R15.2
MISO16: JP102.1 R17.1
MISO17: ICSP8.9 R17.2
MISO18: JP114.1 R19.1
MISO19: ICSP9.9 R19.2
MISO20: JP126.1 R21.1
MISO21: ICSP10.9 R21.2
MISO22: JP138.1 R23.1
MISO23: ICSP11.9 R23.2
MISO24: JP150.1 R25.1
MISO25: ICSP12.9 R25.2
MISO26: JP162.1 R27.1
MISO27: ICSP13.9 R27.2
MISO28: JP174.1 R29.1
MISO29: ICSP14.9 R29.2
MISO30: JP186.1 R31.1
MISO31: ICSP15.9 R31.2
MOSI: ICSP.1 JP14.1
MOSI1: ICSP1.1 JP20.1
MOSI2: ICSP2.1 JP32.1
MOSI3: ICSP3.1 JP44.1
MOSI4: ICSP4.1 JP56.1
MOSI5: ICSP5.1 JP68.1
MOSI6: ICSP6.1 JP80.1
MOSI7: ICSP7.1 JP92.1
MOSI8: ICSP8.1 JP104.1
MOSI9: ICSP9.1 JP116.1
MOSI10: ICSP10.1 JP128.1
MOSI11: ICSP11.1 JP140.1
MOSI12: ICSP12.1 JP152.1
MOSI13: ICSP13.1 JP164.1
MOSI14: ICSP14.1 JP176.1
MOSI15: ICSP15.1 JP188.1
N$1: D5-LED.C PWR-LED.C R2.1
N$2: JP11.1 PWR-LED.A
N$3: D5-LED1.C PWR-LED1.C R4.1
N$4: JP7.1 PWR-LED1.A
N$5: D5-LED2.C PWR-LED2.C R6.1
N$6: JP29.1 PWR-LED2.A
N$7: D5-LED3.C PWR-LED3.C R8.1
N$8: JP41.1 PWR-LED3.A
N$9: D5-LED4.C PWR-LED4.C R10.1
N$10: JP53.1 PWR-LED4.A
N$11: D5-LED5.C PWR-LED5.C R12.1
N$12: JP65.1 PWR-LED5.A
N$13: D5-LED6.C PWR-LED6.C R14.1
N$14: JP77.1 PWR-LED6.A
N$15: D5-LED7.C PWR-LED7.C R16.1
N$16: JP89.1 PWR-LED7.A
N$17: D5-LED8.C PWR-LED8.C R18.1
N$18: JP101.1 PWR-LED8.A
N$19: D5-LED9.C PWR-LED9.C R20.1
N$20: JP113.1 PWR-LED9.A
N$21: D5-LED10.C PWR-LED10.C R22.1
N$22: JP125.1 PWR-LED10.A
N$23: D5-LED11.C PWR-LED11.C R24.1
N$24: JP137.1 PWR-LED11.A
N$25: D5-LED12.C PWR-LED12.C R26.1
N$26: JP149.1 PWR-LED12.A
N$27: D5-LED13.C PWR-LED13.C R28.1
N$28: JP161.1 PWR-LED13.A
N$29: D5-LED14.C PWR-LED14.C R30.1
N$30: JP173.1 PWR-LED14.A
N$31: D5-LED15.C PWR-LED15.C R32.1
N$32: JP185.1 PWR-LED15.A
RESET: ICSP.5 JP15.1
RESET1: ICSP1.5 JP21.1
RESET2: ICSP2.5 JP33.1
RESET3: ICSP3.5 JP45.1
RESET4: ICSP4.5 JP57.1
RESET5: ICSP5.5 JP69.1
RESET6: ICSP6.5 JP81.1
RESET7: ICSP7.5 JP93.1
RESET8: ICSP8.5 JP105.1
RESET9: ICSP9.5 JP117.1
RESET10: ICSP10.5 JP129.1
RESET11: ICSP11.5 JP141.1
RESET12: ICSP12.5 JP153.1
RESET13: ICSP13.5 JP165.1
RESET14: ICSP14.5 JP177.1
RESET15: ICSP15.5 JP189.1
RXI: ICSP.6 JP8.1
RXI1: ICSP1.6 JP2.1
RXI2: ICSP2.6 JP26.1
RXI3: ICSP3.6 JP38.1
RXI4: ICSP4.6 JP50.1
RXI5: ICSP5.6 JP62.1
RXI6: ICSP6.6 JP74.1
RXI7: ICSP7.6 JP86.1
RXI8: ICSP8.6 JP98.1
RXI9: ICSP9.6 JP110.1
RXI10: ICSP10.6 JP122.1
RXI11: ICSP11.6 JP134.1
RXI12: ICSP12.6 JP146.1
RXI13: ICSP13.6 JP158.1
RXI14: ICSP14.6 JP170.1
RXI15: ICSP15.6 JP182.1
SCK: ICSP.7 JP13.1
SCK1: ICSP1.7 JP19.1
SCK2: ICSP2.7 JP31.1
SCK3: ICSP3.7 JP43.1
SCK4: ICSP4.7 JP55.1
SCK5: ICSP5.7 JP67.1
SCK6: ICSP6.7 JP79.1
SCK7: ICSP7.7 JP91.1
SCK8: ICSP8.7 JP103.1
SCK9: ICSP9.7 JP115.1
SCK10: ICSP10.7 JP127.1
SCK11: ICSP11.7 JP139.1
SCK12: ICSP12.7 JP151.1
SCK13: ICSP13.7 JP163.1
SCK14: ICSP14.7 JP175.1
SCK15: ICSP15.7 JP187.1
TXO: ICSP.4 JP9.1
TXO1: ICSP1.4 JP4.1
TXO2: ICSP2.4 JP27.1
TXO3: ICSP3.4 JP39.1
TXO4: ICSP4.4 JP51.1
TXO5: ICSP5.4 JP63.1
TXO6: ICSP6.4 JP75.1
TXO7: ICSP7.4 JP87.1
TXO8: ICSP8.4 JP99.1
TXO9: ICSP9.4 JP111.1
TXO10: ICSP10.4 JP123.1
TXO11: ICSP11.4 JP135.1
TXO12: ICSP12.4 JP147.1
TXO13: ICSP13.4 JP159.1
TXO14: ICSP14.4 JP171.1
TXO15: ICSP15.4 JP183.1
VTG: ICSP.2 SJ1.2 SJ2.2
VTG1: ICSP1.2 SJ3.2 SJ4.2
VTG2: ICSP2.2 SJ5.2 SJ6.2
VTG3: ICSP3.2 SJ7.2 SJ8.2
VTG4: ICSP4.2 SJ9.2 SJ10.2
VTG5: ICSP5.2 SJ11.2 SJ12.2
VTG6: ICSP6.2 SJ13.2 SJ14.2
VTG7: ICSP7.2 SJ15.2 SJ16.2
VTG8: ICSP8.2 SJ17.2 SJ18.2
VTG9: ICSP9.2 SJ19.2 SJ20.2
VTG10: ICSP10.2 SJ21.2 SJ22.2
VTG11: ICSP11.2 SJ23.2 SJ24.2
VTG12: ICSP12.2 SJ25.2 SJ26.2
VTG13: ICSP13.2 SJ27.2 SJ28.2
VTG14: ICSP14.2 SJ29.2 SJ30.2
VTG15: ICSP15.2 SJ31.2 SJ32.2